# Altium PCB PCB1.PcbDoc
Units mil, origin at the board's own origin, x right, y up, seen from the top; angles counter-clockwise.
Board outline 2090 x 1720 mil, 2 copper layers (Top Layer, Bottom Layer); 9 components, 5 nets, 62 pads, 0 vias.
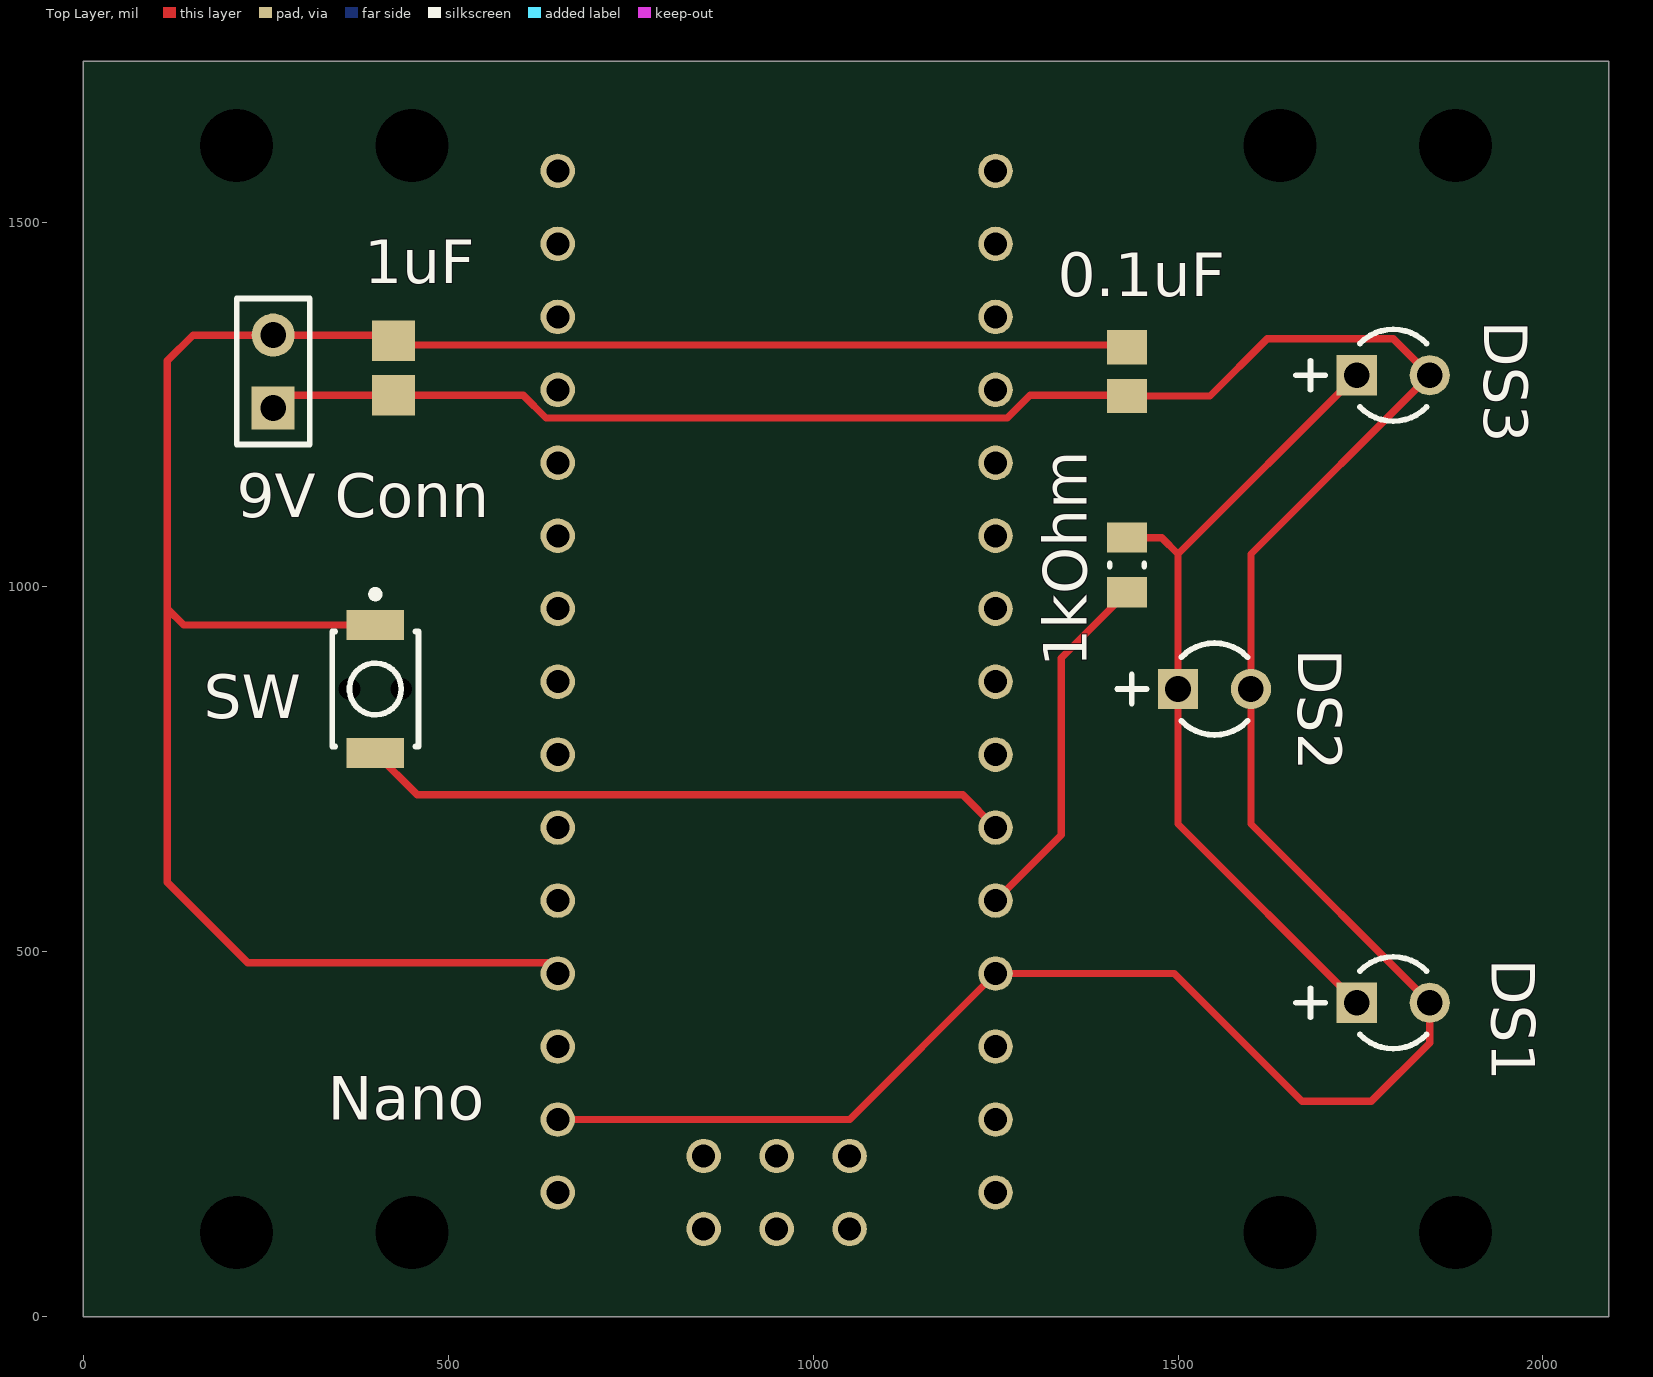
[diagram p0: Top Layer view]
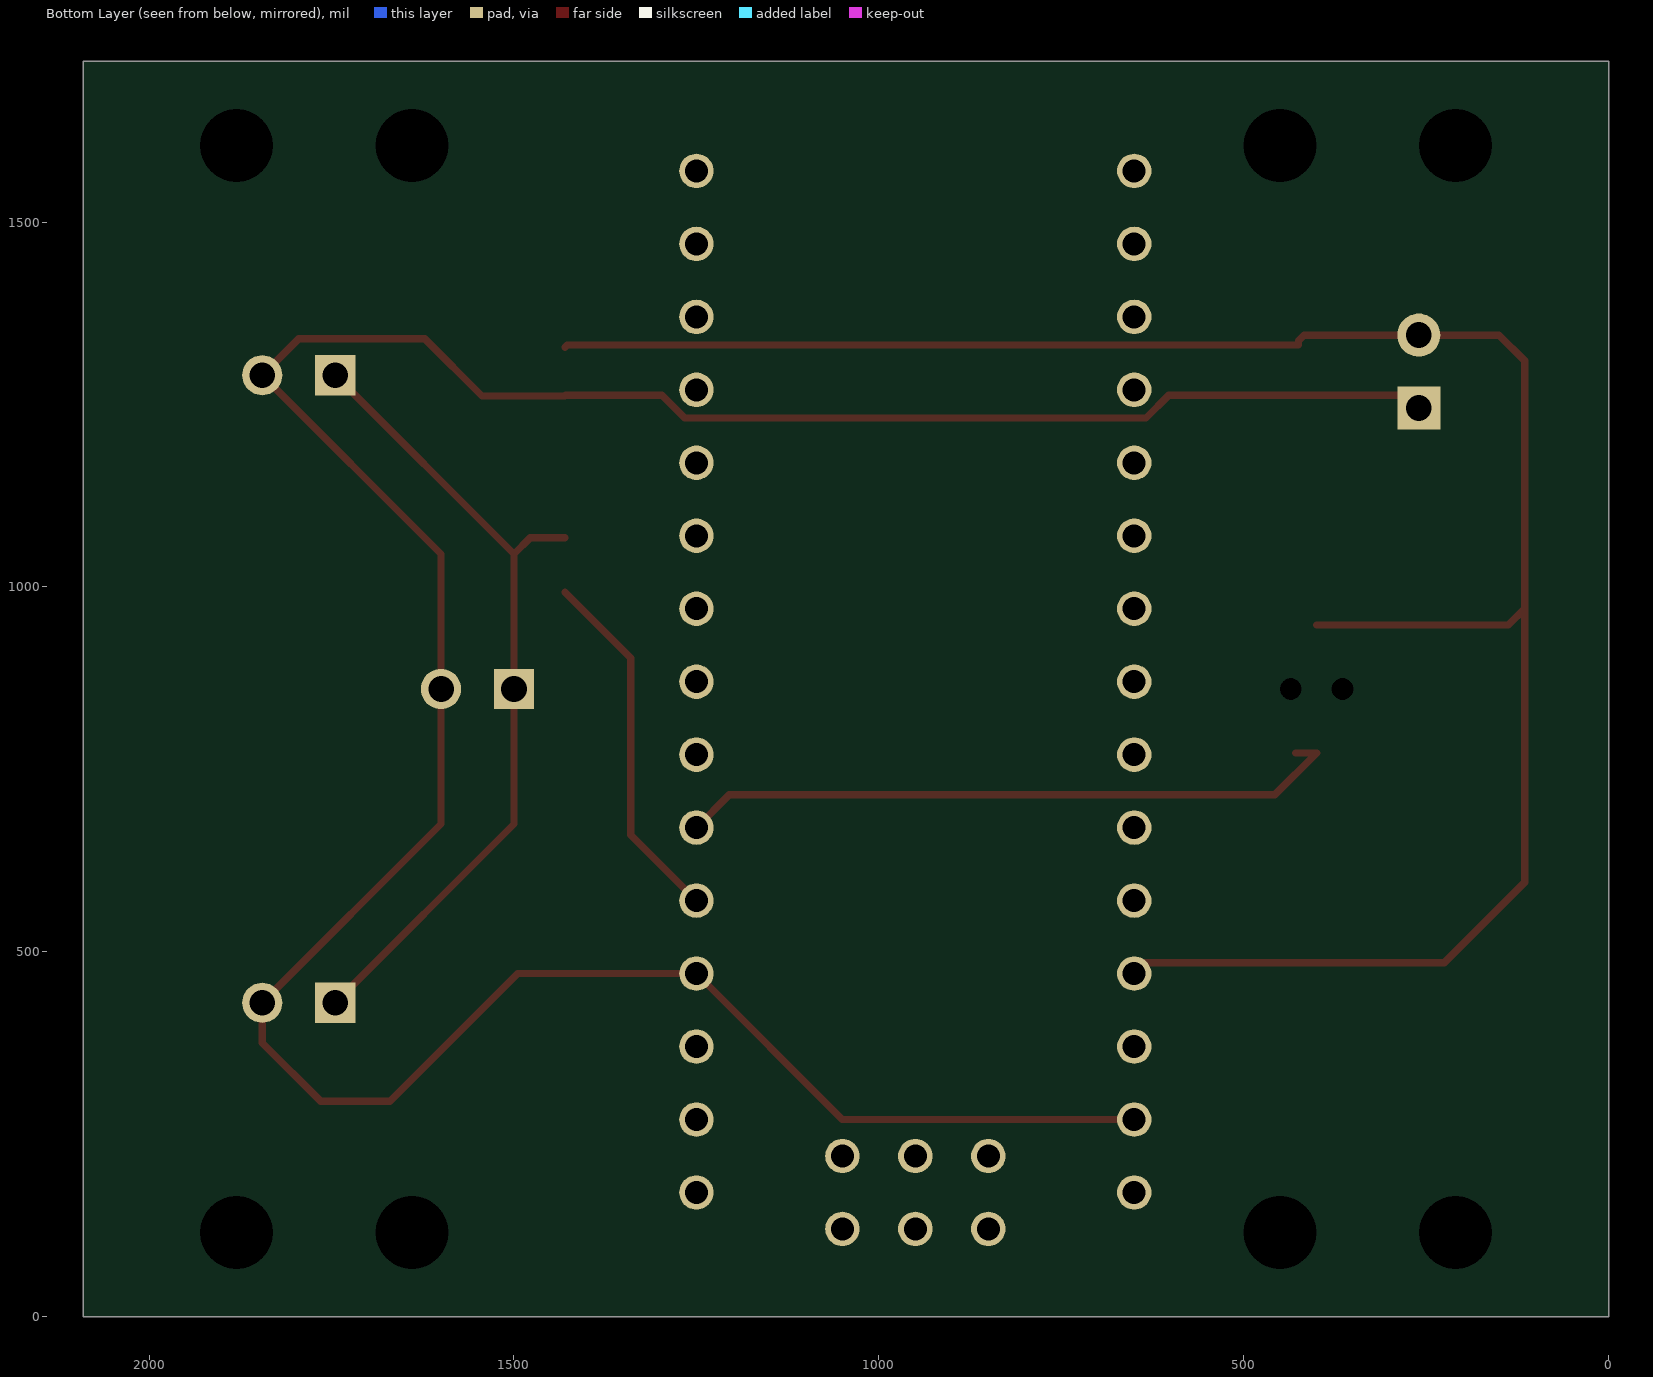
[diagram p1: Bottom Layer view, seen from below]

## Layer stack, top to bottom
Top Solder: solder mask 0.4, Solder Resist, Dk 3.5
Top Layer: signal copper 1.4
Dielectric 1: dielectric 12.6, FR-4, Dk 4.8
Bottom Layer: signal copper 1.4
Bottom Solder: solder mask 0.4, Solder Resist, Dk 3.5

## Board outline
0,1720 2090,1720 2090,0 0,0

## Design rules (kind name [scope] priority, off if disabled: settings)
Clearance [All] p1: gap=10 ignorepadtopadclearanceinfootprint=FALSE except(0: Arc-Hole Track-Hole SMDPad-Hole THPad-Hole Via-Hole Fill-Hole Poly-Hole Region-Hole Text-Hole)
PolygonConnect [All] p1: connectstyle=Relief reliefconductorwidth=10 reliefentries=4 polygonreliefangle="90 Angle" airgapwidth=10
RoomDefinition Schematic [InComponentClass('Schematic')] p1: confinementstyle=ConfineIn formatcopy=TRUE lockcomponents=FALSE outline -805,-1.1 2090,-1.1 2090,1718.9 -805,1718.9
RoutingVias [All] p1: holewidth=28 width=50 viastyle="Through Hole" minholewidth=28 minwidth=50 maxholewidth=28 maxwidth=50
SolderMaskExpansion [All] p1: expansion=4
Width [All] p1: maxlimit=10 minlimit=10 preferedwidth=10
30 further rules are at their usual default settings.

## Components (designator, comment, footprint, x,y, rotation, side; value= is the part's Value field where it differs from the comment)
0.1uF "GRM21BR71A105KA01L-2" CAPC2013X135X45NL10T25 1430,1295 r90 top (schematic designator 0.1uF-2)
1kOhm "1K 5% 0805(2012)" RESC0805(2012)_N 1430,1030 r90 top value="1000.00 Ohm" (schematic designator RLight)
1uF "GRM21BR71E104KA01L" CAPC2013X135X50ML10T20 425,1300 r90 top (schematic designator 1uF-2)
"9V Conn" "Header 2" HDR1X2 260,1245 r90 top (schematic designator "9V Connector")
DS1 "WP710A10QBC/D" KING-WP710A10QBCD_V 1795,430 r0 top
DS2 "WP710A10QBC/D" KING-WP710A10QBCD_V 1550,860 r0 top
DS3 "WP710A10QBC/D" KING-WP710A10QBCD_V 1795,1290 r0 top
Nano "Arduino Nano" NANO 1050,520 r0 top (schematic designator ?)
SW "TVAF06" JNFU-TVAF06_V 400,860 r270 top (schematic designator SW?)

## Footprints (in the part's own frame and the unit in brackets; to place one, negate y for a bottom-side part, rotate by r counter-clockwise, add the part's x,y. Pads: shape width x height; smd on the part's side, far side on the other; paste and mask are expansions set on the pad)
CAPC2013X135X45NL10T25 [mm] "Chip Capacitor, 2-Leads, Body 2.00x1.25mm, IPC Medium Density"
  rect 1.2x1.4 smd: 1(-0.85,0) 2(0.85,0)
  body extent -1.05,-0.67 1.05,0.67, height 1.35
CAPC2013X135X50ML10T20 [mm] "Chip Capacitor, 2-Leads, Body 2.00x1.25mm, IPC Low Density"
  rect 1.4x1.5 smd: 1(-0.95,0) 2(0.95,0)
  body extent -1.05,-0.67 1.05,0.67, height 1.35
HDR1X2 [mm] "Connector; Header; 2 Position"
  rect 1.5x1.5 hole 0.9: 1(0,0)
  round 1.5 hole 0.9: 2(2.54,0)
  silkscreen extent -1.27,-1.27 3.81,1.27
JNFU-TVAF06_V [mm] "Switch, Push Button, SMD, 2-Leads, Body 3x4mm"
  rect 1.05x2 smd: 1(-2.225,0) 2(2.225,0)
  round 0.4 hole 0.75 unplated: MH1(0,0.9) MH2(0,-0.9)
  silkscreen extent -3.42,-1.5 2,1.5, body extent -2,-1.5 2,1.5, height 2
KING-WP710A10QBCD_V [mm] "THD, 2-Leads, Dia 3.2mm"
  rect 1.4x1.4 hole 0.889 paste-0.025 mask+0.064: 1(-1.27,0)
  round 1.4 hole 0.889 paste-0.025 mask+0.064: 2(1.27,0)
  silkscreen extent -3.39,-1.6 1.16,1.6
NANO [mil]
  round 47.25 / inner round 60 / far side round 47.25 hole 31.5: 3.3V(-400,950) 5V(-400,-50) A0(-400,750) A1(-400,650) A2(-400,550) A3(-400,450) A4(-400,350) A5(-400,250) A6(-400,150) A7(-400,50) AREF(-400,850) D2(200,50) D3(200,150) D4(200,250) D5(200,350) D6(200,450) D7(200,550) D8(200,650) D9(200,750) D10(200,850) D11(200,950) D12(200,1050) D13(-400,1050) GND(-400,-250) GND1(200,-50) ICSP1(-200,-400) ICSP2(-200,-300) ICSP3(-100,-400) ICSP4(-100,-300) ICSP5(0,-400) ICSP6(0,-300) RAW(-400,-350) RST(-400,-150) RST1(200,-150) RX1(200,-250) TX0(200,-350)
RESC0805(2012)_N [mm] "Chip Resistor, Body 2.0x1.3mm, IPC Medium Density"
  rect 1.05x1.4 smd: 1(-0.95,0) 2(0.95,0)
  silkscreen extent -0.05,-0.6 0.05,0.6, body extent -1.1,-0.67 1.1,0.68, height 0.7

## Part data
0.1uF: library part CMP-2007-03551-1, Manufacturer=Murata, Part Number=GRM21BR71A105KA01L
1kOhm: library part CMP-1013-00074-1, "1K 0.125W 5% 0805 (2012 Metric)  SMD", Case-EIA=0805, Case-Metric=2012, Power="0.125 W", Tolerance="5 %", Technology=SMT
1uF: library part CMP-2007-03456-1, Manufacturer=Murata, Part Number=GRM21BR71E104KA01L
"9V Conn": "Header, 2-Pin", LatestRevisionDate=17-Jul-2002, LatestRevisionNote="Re-released for DXP Platform.", Publisher="Altium Limited"
DS1 DS2 DS3: library part CMP-2000-07416-1, "Blue LED, 3.3 V, 20 mA, -40 to 85 degC, 2-Pin THD, RoHS, Bulk", Forward Current=20mA, Forward Voltage=3.3V, Illumination Color=Blue, Lens Color/Style=WaterClear, Manufacturer=Kingbright, Maximum Operating Temperature=+85C, Minimum Operating Temperature=-40C, Package Description="2-Pin Through Hole Device, Dia 3.2 mm", Package Reference=WP710A10QBCD, Wavelength/Color Temperature=470nm, Datasheet URL=https://datasheet.ciiva.com/2121/wp710a10qbc-d-2121617.pdf, Datasheet Version="Rev. 5B, 09/2014", Factory Pack Quantity=500, LED Size=T-1, Lens Dimensions=3mmx4.6mm, Lens Shape=Dome, Luminous Intensity=1600mcd, Manufacturer URL=http://www.kingbright.com/, Mounting Style=ThroughHole, Mounting Technology=ThroughHole, Packaging=Bulk, Product Category=StandardLEDs-ThroughHole, RoHS=Details, Type=SolidStateLEDLamp, Viewing Angle=20deg
Nano: library part NANO, DeviceSetName=NANO, GateName_1=G$1, LibraryName=Arduino-clone, Package=NANO, SymbolName_1=NANO
SW: library part CMP-0587-00001-2, "Switch, SPST Push Button, 50 mA, 12 V DC, SMD, -30 to 85 degC, RoHS", Contact Resistance="100 mW max", Dielectric Strength="250 V AC for 1 min", Insulation Resistance="100 MW min. 100 V DC", Manufacturer=Jianfu, Operating Temperature="-30 to 85 degC", Rating="50 mA. 12 V DC", ComponentLink1Description="Manufacturer URL", ComponentLink1URL=http://www.jian-fu.com/, ComponentLink2Description=Datasheet, ComponentLink2URL=http://en.jian-fu.com/product-22.html, Lifetime="100000 Cycles min", Mounting Technology="Surface Mount", PackageDescription="2-Pin Switch, Push Button, SMD, Body 2.9 x 3.9 mm", PackageReference=TVAF06, PartNumber=TVAF06, RoHS=TRUE, Travel="0.13 +/- 0.05 mm"

## Free pads (board coordinates)
  round 60 hole 100: 3(210,115) 3(210,1605) 3(450,115) 3(450,1605) 3(1640,115) 3(1640,1605) 3(1880,115) 3(1880,1605)

## Nets (pads, with @x,y where several pads share a name; then routed paths per layer and width w, separated by ;. In a path a pad name is that pad's centre, name@x,y a point inside that pad or via, vN(x,y) a via of type N, cw(c..) or ccw(c..) an arc to the next point about the centre after c; other vN are vias at no path point)
GND: 0.1uF.1 1uF.1 "9V Conn.1" DS1.2 DS2.2 DS3.2 Nano.GND Nano.GND1 | length 4173.2
  Top Layer w10: 260,1245 277.6,1262.6 1uF.1 602.78,1262.6 634,1231.38 1266,1231.38 1297.22,1262.6 1428.94,1262.6 0.1uF.1 1543.93,1261.54 1622.39,1340 1795,1340 DS3.2 1600,1045 DS2.2 1600,675 DS1.2 1845,375 1765,295 1670,295 1495,470 Nano.GND1 1050,270 Nano.GND
Net0.1uF-2_2: 0.1uF.2 1uF.2 "9V Conn.2" Nano.5V SW.1 | length 2935.9
  Top Layer w10: SW.1 137.4,947.6 115,970 ; Nano.5V 635,485 225,485 115,595 115,970 ; 0.1uF.2 1427.09,1331.38 425,1331.38 1uF.2 417.4,1345 260,1345 150,1345 115,1310 115,970
Net?_D2: 1kOhm.1 Nano.D2 | length 497.2
  Top Layer w10: Nano.D2 1340,660 1340,902.6 1kOhm.1
Net?_D3: Nano.D3 SW.2 | length 921.4
  Top Layer w10: SW.2@428.97,772.4 SW.2 457.4,715 1205,715 Nano.D3
NetDS1_1: 1kOhm.2 DS1.1 DS2.1 DS3.1 | length 1142.2
  Top Layer w10: 1kOhm.2 1477.6,1067.4 1500,1045 ; DS1.1 1500,675 DS2.1 1500,1045 ; DS3.1 1500,1045
pads on no net: Nano.3.3V Nano.A0 Nano.A1 Nano.A2 Nano.A3 Nano.A4 Nano.A5 Nano.A6 Nano.A7 Nano.AREF Nano.D4 Nano.D5 Nano.D6 Nano.D7 Nano.D8 Nano.D9 Nano.D10 Nano.D11 Nano.D12 Nano.D13 Nano.ICSP1 Nano.ICSP2 Nano.ICSP3 Nano.ICSP4 Nano.ICSP5 Nano.ICSP6 Nano.RAW Nano.RST Nano.RST1 Nano.RX1 Nano.TX0 SW.MH1 SW.MH2

## Polygon pours and split planes (outlines as drawn)
no net on Top Layer "Top Layer-No Net 1" (solid, pour order 10): -770,979.53
no net on Top Layer "Top Layer-No Net 2" (solid, pour order 2): -210,185